# Altium PCB plotter.PcbDoc
Units mm, origin at the board's own origin, x right, y up, seen from the top; angles counter-clockwise.
Board outline 112.85 x 137.5 mm, 2 copper layers (Top Layer, Bottom Layer); 113 components, 83 nets, 522 pads, 138 vias.
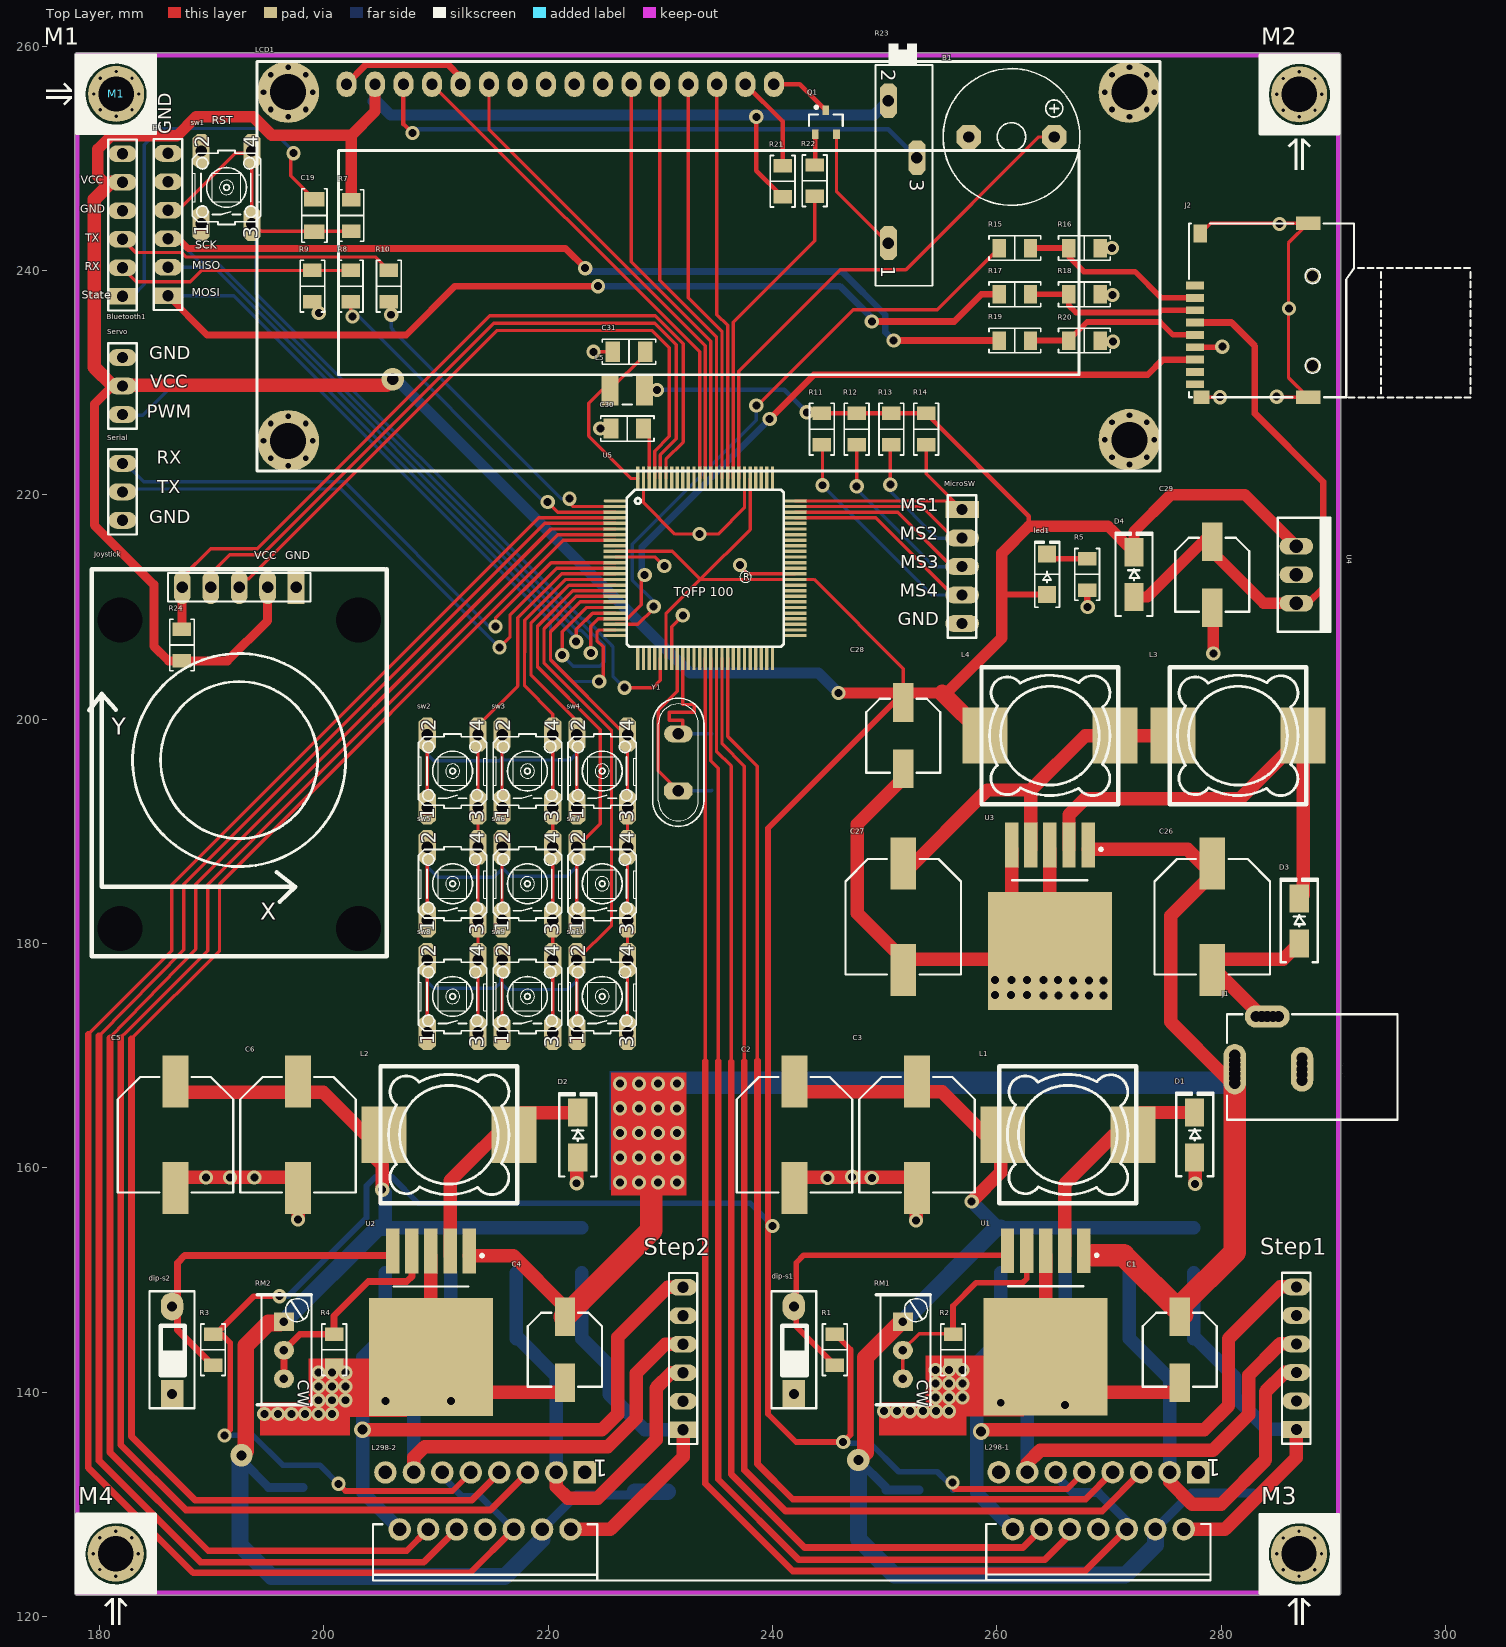
[diagram p0: Top Layer view]
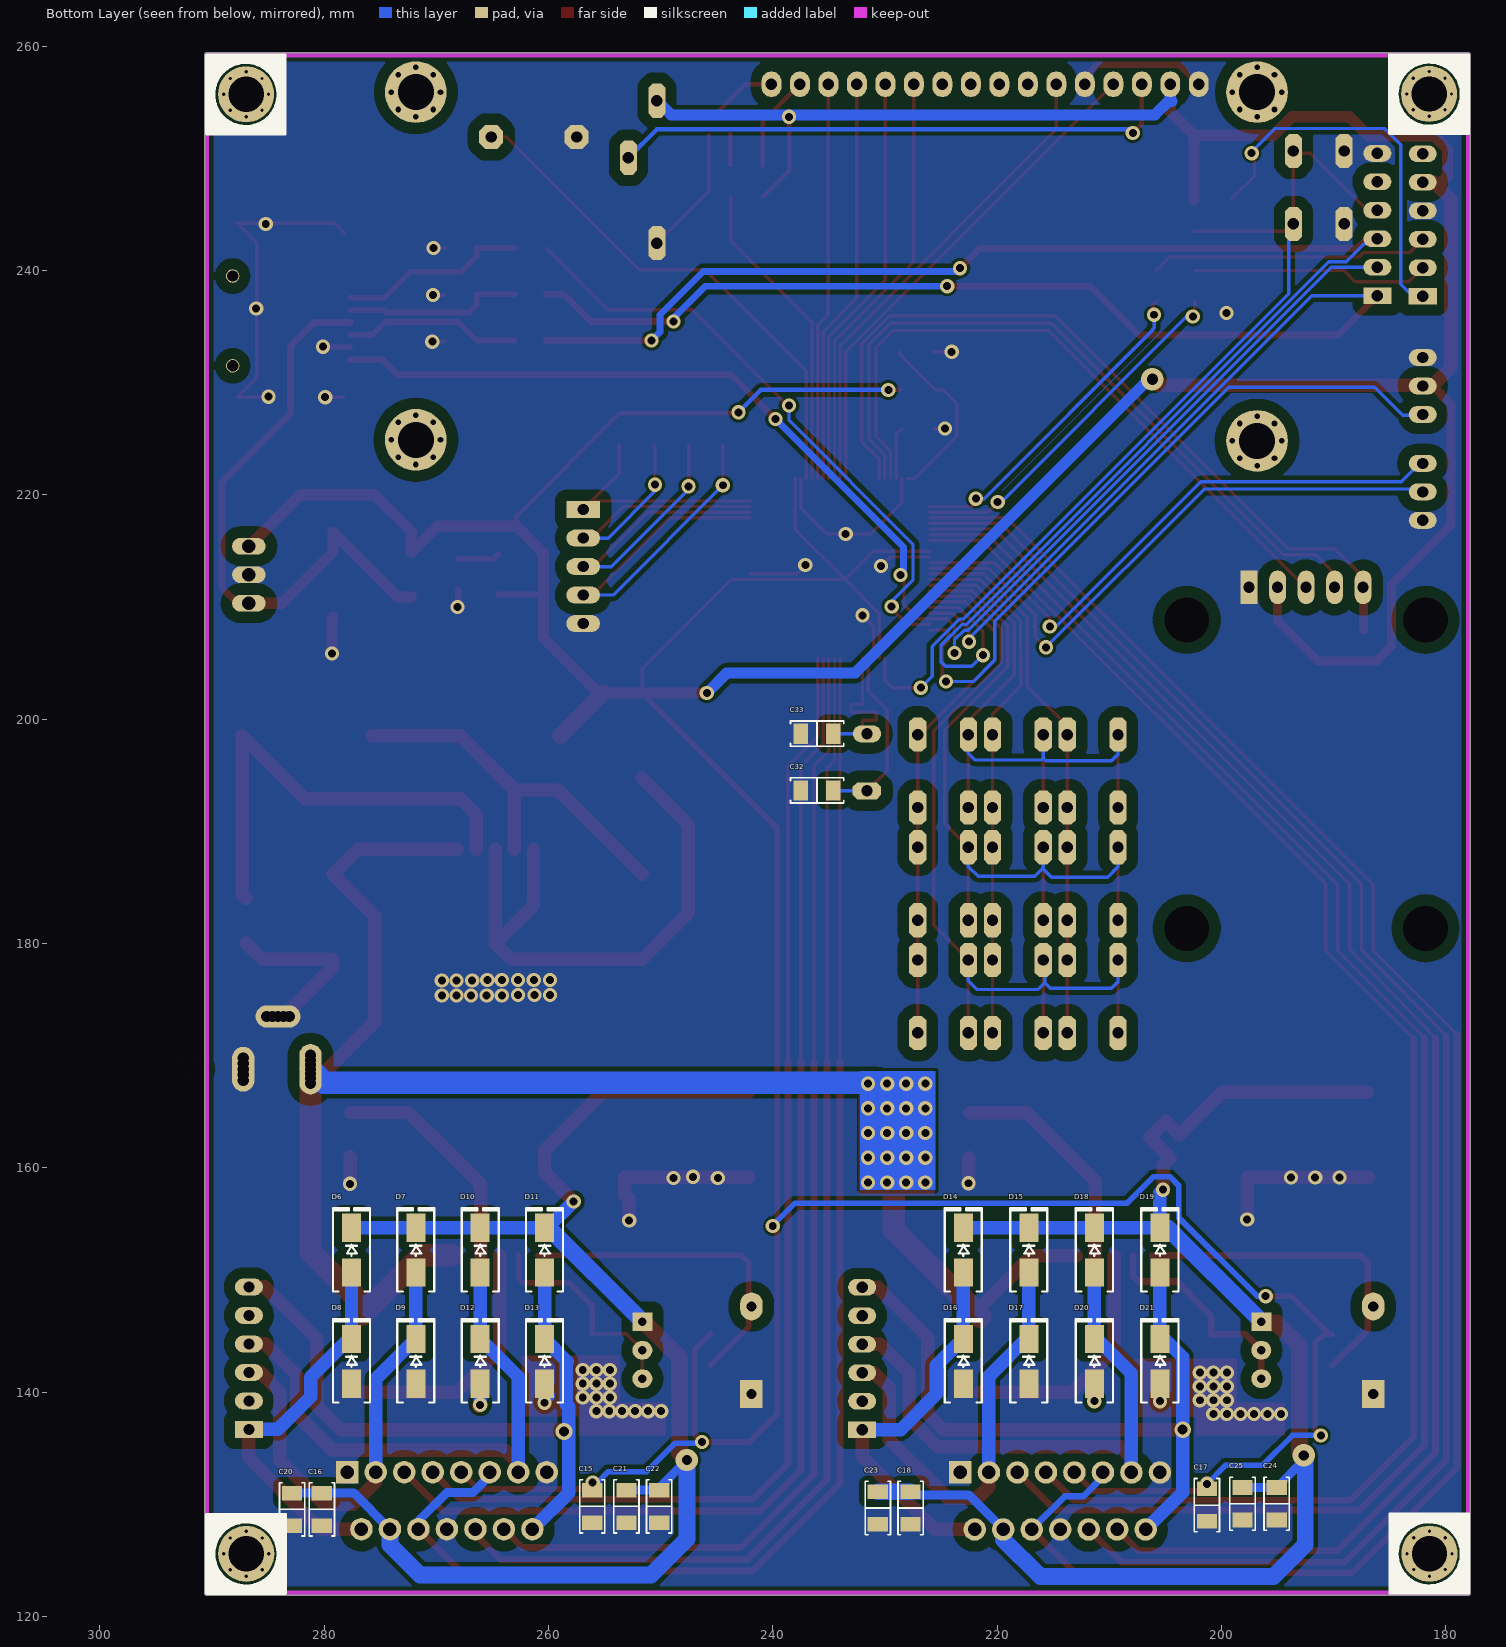
[diagram p1: Bottom Layer view, seen from below]

## Layer stack, top to bottom
Top Solder: solder mask 0.0102, Solder Resist, Dk 3.5
Top Layer: signal copper 0.0356
Dielectric 1: dielectric 0.32, FR-4, Dk 4.8
Bottom Layer: signal copper 0.0356
Bottom Solder: solder mask 0.0102, Solder Resist, Dk 3.5

## Board outline
177.8,122.1 ccw(c178,122.1) 178,121.9 290.45,121.9 ccw(c290.45,122.1) 290.65,122.1 290.65,259.2 ccw(c290.45,259.2) 290.45,259.4 178,259.4 ccw(c178,259.2) 177.8,259.2

## Design rules (kind name [scope] priority, off if disabled: settings)
Clearance [All] p1: gap=0.254 ignorepadtopadclearanceinfootprint=TRUE except(0: Arc-Hole Track-Hole SMDPad-Hole THPad-Hole Via-Hole Fill-Hole Poly-Hole Region-Hole Text-Hole; 0.08: Arc-SMDPad Track-SMDPad SMDPad-SMDPad; 0.195: Arc-Arc Arc-Track Track-Track; 0.4: Arc-Fill Arc-Poly Arc-Region Track-Fill Track-Poly Track-Region; 0.8: SMDPad-Fill SMDPad-Poly SMDPad-Region; 1: THPad-Fill THPad-Poly THPad-Region)
Height [All] p1 off: minheight=0 maxheight=25.4 prefheight=12.7
Length "InNet('NetC33_1') Or InNet('NetC32_1')_1" [InNet('NetC33_1') Or InNet('NetC32_1')] p1: maxlimit=16.306 minlimit=16
Length "InNet('NetC33_1') Or InNet('NetC32_1')" [InNet('NetC33_1') Or InNet('NetC32_1')] p2: maxlimit=16.306 minlimit=0
PolygonConnect [All] p1: connectstyle=Direct reliefconductorwidth=0.254 reliefentries=4 polygonreliefangle="90 Angle" airgapwidth=0.254
RoomDefinition step-drive [InComponentClass('step-drive')] p1 off: confinementstyle=ConfineIn formatcopy=TRUE lockcomponents=FALSE outline 334.719,324.612 522.933,324.612 522.933,348.742 334.719,348.742
RoomDefinition power2 [InComponentClass('power2')] p2 off: confinementstyle=ConfineIn formatcopy=TRUE lockcomponents=FALSE outline 333.121,297.688 437.007,297.688 437.007,322.453 333.121,322.453
RoomDefinition power1 [InComponentClass('power1')] p3 off: confinementstyle=ConfineIn formatcopy=TRUE lockcomponents=FALSE outline 331.346,278.384 480.825,278.384 480.825,297.18 331.346,297.18
RoomDefinition main [InComponentClass('main')] p4 off: confinementstyle=ConfineIn formatcopy=TRUE lockcomponents=FALSE outline 333.121,255.143 389.509,255.143 389.509,276.479 333.121,276.479
RoomDefinition accessory [InComponentClass('accessory')] p5 off: confinementstyle=ConfineIn formatcopy=TRUE lockcomponents=FALSE outline 333.121,150.749 482.727,150.749 482.727,169.037 333.121,169.037
RoomDefinition accessory2 [InComponentClass('accessory2')] p6 off: confinementstyle=ConfineIn formatcopy=TRUE lockcomponents=FALSE outline 333.527,170.861 580.161,170.861 580.161,254.554 333.527,254.554
RoutingVias [All] p1: holewidth=0.711 width=1.27 viastyle="Through Hole" minholewidth=0.711 minwidth=1.27 maxholewidth=0.711 maxwidth=1.27
SolderMaskExpansion [All] p1: expansion=0.102 istentingtop=FALSE
Width [All] p1: maxlimit=2.5 minlimit=0.254 preferedwidth=0.3
29 further rules are at their usual default settings.

## Classes and differential pairs
component class step-drive: C15 C16 C17 C18 C20 C21 C22 C23 C24 C25 D6 D7 D8 D9 D10 D11 D12 D13 D14 D15 D16 D17 D18 D19 D20 D21 L298-1 L298-2 Step1 Step2
component class power2: C26 C27 C28 C29 D3 D4 L3 L4 led1 R5 U3 U4
component class power1: C1 C2 C3 C4 C5 C6 D1 D2 dip-s1 dip-s2 J1 L1 L2 R1 R2 R3 R4 RM1 RM2 U1 U2
component class main: C30 C31 C32 C33 L5 M1 M2 M3 M4 U5 Y1
component class accessory: Bluetooth1 C19 H1 J2 Joystick MicroSW R7 R8 R9 R10 R11 R12 R13 R14 R15 R16 R17 R18 R19 R20 R24 Servo sw1
component class accessory2: B1 LCD1 Q1 R21 R22 R23 Serial sw2 sw3 sw4 sw5 sw6 sw7 sw8 sw9 sw10

## Components (designator, comment, footprint, x,y, rotation, side; value= is the part's Value field where it differs from the comment)
B1 "Buzzer small" My_Buzzer 261.3,251.9 r0 top
Bluetooth1 "H-1x6" H-1x6 182.05,244.177 r90 top
C1 "" "CAP ALUM 6.6MM" 276.3,143.777 r270 top value=100uF
C2 "" "CAP ALUM 10.3MM" 241.95,162.95 r270 top value=1000uF
C3 "" "CAP ALUM 10.3MM" 252.88,162.95 r270 top value=1000uF
C4 "" "CAP ALUM 6.6MM" 221.488,143.777 r270 top value=100uF
C5 "" "CAP ALUM 10.3MM" 186.77,162.95 r270 top value=1000uF
C6 "" "CAP ALUM 10.3MM" 197.7,162.95 r270 top value=1000uF
C15 "100nF" "CAP 1206/3216 - 0.8MM" 256.094,129.817 r90 bottom
C16 "100nF" "CAP 1206/3216 - 0.8MM" 280.2,129.55 r90 bottom
C17 "100nF" "CAP 1206/3216 - 0.8MM" 201.295,129.921 r90 bottom
C18 "100nF" "CAP 1206/3216 - 0.8MM" 227.711,129.667 r90 bottom
C19 "Cap" "CAP 1206/3216 - 0.8MM" 199.15,244.899 r270 top value=100nF
C20 "Cap" "CAP 1206/3216 - 0.8MM" 282.85,129.55 r270 bottom value=100nF
C21 "Cap" "CAP 1206/3216 - 0.8MM" 253.046,129.817 r270 bottom value=100nF
C22 "Cap" "CAP 1206/3216 - 0.8MM" 250.125,129.817 r270 bottom value=100nF
C23 "Cap" "CAP 1206/3216 - 0.8MM" 230.632,129.667 r270 bottom value=100nF
C24 "Cap" "CAP 1206/3216 - 0.8MM" 195.072,130.048 r270 bottom value=100nF
C25 "Cap" "CAP 1206/3216 - 0.8MM" 198.12,130.048 r270 bottom value=100nF
C26 "" "CAP ALUM 10.3MM" 279.208,182.382 r270 top value=680uF
C27 "" "CAP ALUM 10.3MM" 251.649,182.382 r270 top value=1000uF
C28 "" "CAP ALUM 6.6MM" 251.649,198.524 r270 top value=100uF
C29 "Cap" "CAP ALUM 6.6MM" 279.208,212.875 r270 top value=100u
C30 "Cap" "CAP 1206/3216 - 0.8MM" 227.05,225.9 r0 top value=100nF
C31 "Cap" "CAP 1206/3216 - 0.8MM" 227.2,232.75 r0 top value=100nF
C32 "Cap" "CAP 1206/3216 - 0.8MM" 236.05,193.65 r0 bottom value=22pF
C33 "Cap" "CAP 1206/3216 - 0.8MM" 236.05,198.7 r0 bottom value=22pF
D1 "1n5822" "DO214AC SMA" 277.633,162.93 r90 top
D2 "1n5822" "DO214AC SMA" 222.638,162.916 r90 top
D3 "1n5822" "DO214AC SMA" 286.955,182.014 r90 top
D4 "Diode 1N4007" "DO214AC SMA" 272.223,212.875 r90 top
D6 "UF4007" "DO214AC SMA" 277.554,152.654 r90 bottom
D7 "UF4007" "DO214AC SMA" 271.818,152.654 r90 bottom
D8 "UF4007" "DO214AC SMA" 277.554,142.748 r90 bottom
D9 "UF4007" "DO214AC SMA" 271.818,142.748 r90 bottom
D10 "UF4007" "DO214AC SMA" 266.082,152.654 r90 bottom
D11 "UF4007" "DO214AC SMA" 260.346,152.654 r90 bottom
D12 "UF4007" "DO214AC SMA" 266.082,142.748 r90 bottom
D13 "UF4007" "DO214AC SMA" 260.346,142.748 r90 bottom
D14 "UF4007" "DO214AC SMA" 223.012,152.654 r90 bottom
D15 "UF4007" "DO214AC SMA" 217.17,152.654 r90 bottom
D16 "UF4007" "DO214AC SMA" 223.012,142.748 r90 bottom
D17 "UF4007" "DO214AC SMA" 217.17,142.748 r90 bottom
D18 "UF4007" "DO214AC SMA" 211.328,152.654 r90 bottom
D19 "UF4007" "DO214AC SMA" 205.486,152.654 r90 bottom
D20 "UF4007" "DO214AC SMA" 211.328,142.748 r90 bottom
D21 "UF4007" "DO214AC SMA" 205.486,142.748 r90 bottom
dip-s1 "dip-sw1" DIP2 241.9,139.84 r90 top
dip-s2 "dip-sw1" DIP2 186.466,139.84 r90 top
H1 "H-1x6" H-1x6 186.1,244.217 r90 top
J1 "Power Jack" "Power Jack" 295.709,168.79 r180 top
J2 "MicroSD" MicroSD_1 282.9,236.45 r90 top
Joystick "H-1x5" H-1x5 192.45,211.75 r180 top
L1 "Inductor" "INDUCTOR - 12X12X7" 266.33,162.95 r270 top value=100uH
L2 "Inductor" "INDUCTOR - 12X12X7" 211.15,162.95 r270 top value=100uH
L3 "Inductor" "INDUCTOR - 12X12X7" 281.494,198.524 r270 top value=100uH
L4 "Inductor" "INDUCTOR - 12X12X7" 264.73,198.524 r270 top value=20uH
L5 "Inductor" C1210_M 227.05,229.35 r0 top value=10uH
L298-1 "L298" L298 268.794,130.198 r180 top
L298-2 "L298" L298 214.122,130.175 r180 top
LCD1 "20x4" "LCD 16x2" 202.02,256.6 r0 top locked
led1 "LED" "LED 1206/3216 RED" 264.476,212.908 r90 top
M1 "Screw" "Board Screw" 181.486,255.736 r270 top
M2 "Screw" "Board Screw" 286.95,255.7 r0 top
M3 "Screw" "Board Screw" 286.936,125.586 r0 top
M4 "Screw" "Board Screw" 181.45,125.6 r0 top
MicroSW "H-1x5" H-1x5 256.9,213.6 r270 top
Q1 "C945" SOT23_L 244.75,253.2 r90 top
R1 "Res1" "RES 1206/3216" 245.553,143.777 r90 top value=10K
R2 "Res1" "RES 1206/3216" 256.094,143.777 r90 top value=1.21K
R3 "Res1" "RES 1206/3216" 190.119,143.777 r90 top value=10K
R4 "Res1" "RES 1206/3216" 200.914,143.777 r90 top value=1.21K
R5 "Res1" "RES 1206/3216" 268.05,212.908 r270 top value=1K
R7 "Res1" "RES 1206/3216" 202.45,244.899 r90 top value=10K
R8 "Res1" "RES 1206/3216" 202.393,238.6 r90 top value=2.7k
R9 "Res1" "RES 1206/3216" 198.986,238.6 r90 top value=4.7k
R10 "Res1" "RES 1206/3216" 205.8,238.6 r270 top value=1K
R11 "Res1" "RES 1206/3216" 244.4,225.85 r90 top value=1K
R12 "Res1" "RES 1206/3216" 247.5,225.85 r90 top value=1K
R13 "Res1" "RES 1206/3216" 250.6,225.85 r90 top value=1K
R14 "Res1" "RES 1206/3216" 253.7,225.85 r90 top value=1K
R15 "Res1" "RES 1206/3216" 261.6,242 r180 top value=2.2K
R16 "Res1" "RES 1206/3216" 267.8,242 r0 top value=3.3K
R17 "Res1" "RES 1206/3216" 261.6,237.875 r0 top value=2.2K
R18 "Res1" "RES 1206/3216" 267.8,237.875 r180 top value=3.3K
R19 "Res1" "RES 1206/3216" 261.6,233.75 r0 top value=2.2K
R20 "Res1" "RES 1206/3216" 267.8,233.75 r180 top value=3.3K
R21 "Res1" "RES 1206/3216" 240.9,247.95 r90 top value=330
R22 "Res1" "RES 1206/3216" 243.75,248 r90 top value=1K
R23 "Multi_turn" My_Pot_trim 251.6,248.15 r270 top value=10K
R24 "Res1" "RES 1206/3216" 187.35,206.6 r90 top value=1K
RM1 "Multi_turn" "Multi Turn 02" 251.624,146.277 r0 top value=50K
RM2 "Multi_turn" "Multi Turn 02" 196.444,146.277 r0 top value=50K
Serial "H-1x3" H-1x3 182.05,220.26 r270 top
Servo "H-1x3" H-1x3 182.05,229.7 r90 top
Step1 "H-1x6" H-1x6 286.701,143.152 r90 top
Step2 "H-1x6" H-1x6 232.029,143.129 r90 top
sw1 "Tac switch" MY_TACTILE-PTH 191.3,247.45 r90 top
sw2 "Tac switch" MY_TACTILE-PTH 211.455,195.419 r90 top
sw3 "Tac switch" MY_TACTILE-PTH 218.123,195.419 r90 top
sw4 "Tac switch" MY_TACTILE-PTH 224.79,195.419 r90 top
sw5 "Tac switch" MY_TACTILE-PTH 211.455,185.373 r90 top
sw6 "Tac switch" MY_TACTILE-PTH 218.123,185.373 r90 top
sw7 "Tac switch" MY_TACTILE-PTH 224.79,185.373 r90 top
sw8 "Tac switch" MY_TACTILE-PTH 211.455,175.328 r90 top
sw9 "Tac switch" MY_TACTILE-PTH 218.123,175.328 r90 top
sw10 "Tac switch" MY_TACTILE-PTH 224.79,175.328 r90 top
U1 "lm2596-adj" DPAK170P1430X238-6N 264.349,146.2 r270 top
U2 "lm2596-adj" DPAK170P1430X238-6N 209.55,146.177 r270 top
U3 "lm2596-5v" DPAK170P1430X238-6N 264.73,182.382 r270 top
U4 "LF33" REG-7805-WALL 286.701,212.875 r270 top
U5 "ATMEGA2560" MY_ATMEGA2560 231.587,213.704 r0 top
Y1 "CRYSTAL" My_Crystal 231.6,196.15 r90 top locked

## Footprints (in the part's own frame and the unit in brackets; to place one, negate y for a bottom-side part, rotate by r counter-clockwise, add the part's x,y. Pads: shape width x height; smd on the part's side, far side on the other; paste and mask are expansions set on the pad)
"Board Screw" [mm]
  round 0.6 hole 0.3: S(-2,0) S(-1.414,1.414) S(-1.414,-1.414) S(0,2) S(0,-2) S(1.414,1.414) S(1.414,-1.414) S(2,0)
  round 5 hole 3.15 mask+0.1: S(0,0)
  silkscreen extent -3.49,-6.75 3.56,3.52
C1210_M [mm] "Chip Capacitor, Body 3.2x2.5mm, IPC Low Density"
  rect 1.5x2.8 smd: 1(-1.55,0) 2(1.55,0)
  silkscreen extent -0.4,-1.3 0.4,1.3, body extent -1.7,-1.35 1.7,1.35, height 1.5
"CAP 1206/3216 - 0.8MM" [mm] "Chip Capacitor, 2-Leads, Body 3.25x1.60mm, IPC Medium Density"
  rect 1.3x1.8 smd: 1(-1.45,0) 2(1.45,0)
  silkscreen extent -2.37,-1.12 2.37,1.12, body extent -1.6,-0.8 1.6,0.8, height 0.8
"CAP ALUM 6.6MM" [mm] "Aluminum Electrolytic Capacitor, Body 6.60x6.60x7.70mm, IPC Low Density"
  rect 3.45x1.8 smd: 1(-2.95,0) 2(2.95,0)
  silkscreen extent -3.3,-3.3 3.3,3.3, body extent -3.5,-3.3 3.5,3.3, height 7.7
"CAP ALUM 10.3MM" [mm] "Aluminum Electrolytic Capacitor, Body 10.30x10.30x10.50mm, IPC Low Density"
  rect 4.65x2.3 smd: 1(-4.75,0) 2(4.75,0)
  silkscreen extent -5.15,-5.15 5.15,5.15, body extent -5.8,-5.15 5.8,5.15, height 10.5
DIP2 [mm]
  rect 2.5x2 hole 0.9: 1(0,0)
  oval 2.5x2 hole 0.9: 2(7.8,0)
  silkscreen extent -1.27,-2 9.14,2
"DO214AC SMA" [mm] "Molded Diode, 2-Leads, Body 4.30x2.60mm, IPC Medium Density"
  rect 2.5x1.7 smd: 1(-2,0) 2(2,0)
  silkscreen extent -3.68,-1.65 3.75,1.65, body extent -2.6,-1.37 2.6,1.37, height 2.4
DPAK170P1430X238-6N [mm] "D2-PAK, 6-Pads, Body 6.20x6.72mm (max), IPC Medium Density"
  rect 4x1.2 smd: 1(-6.4,3.4) 2(-6.4,1.7) 3(-6.4,0) 4(-6.4,-1.7) 5(-6.4,-3.4)
  rect 10.5x11.05 smd: 3(3.048,0)
  silkscreen extent -6.12,-3.35 -3.25,4.68, body extent -2.05,-3.35 4.15,3.35, height 2.38
H-1x3 [mm]
  oval 1.5x2.5 hole 1: 1(-2.54,0) 2(0,0) 3(2.54,0)
  silkscreen extent -3.81,-1.27 3.81,1.27
H-1x5 [mm]
  rect 1.5x3 hole 1: 1(-5.08,0)
  oval 1.5x3 hole 1: 2(-2.54,0) 3(0,0) 4(2.54,0) 5(5.08,0)
  silkscreen extent -6.35,-1.27 6.35,1.27
H-1x6 [mm]
  rect 1.5x2.5 hole 1: 1(-6.477,0)
  oval 1.5x2.5 hole 1: 2.5(-3.937,0) 3(-1.397,0) 4(1.143,0) 5(3.683,0) 6(6.223,0)
  silkscreen extent -7.75,-1.27 7.49,1.27
"INDUCTOR - 12X12X7" [mm]
  rect 5x4 smd: 1(0,5.8) 2(0,-5.8)
  silkscreen extent -6.1,-6.1 6.1,6.1
L298 [mm]
  rect 2x2 hole 1.2: 1(-9.144,-2.667)
  round 2 hole 1.2: 2(-7.874,2.413) 3(-6.604,-2.667) 4(-5.334,2.413) 5(-4.064,-2.667) 6(-2.794,2.413) 7(-1.524,-2.667) 8(-0.254,2.413) 9(1.016,-2.667) 10(2.286,2.413) 11(3.556,-2.667) 12(4.826,2.413) 13(6.096,-2.667) 14(7.366,2.413) 15(8.636,-2.667)
  silkscreen extent -10.25,1.96 9.75,6.96
"LCD 16x2" [mm] "Character LCD, 2 Row, 16 Colunm"
  oval 1.778x2.286 hole 1.016: 1(0,0) 2(2.54,0) 3(5.08,0) 4(7.62,0) 5(10.16,0) 6(12.7,0) 7(15.24,0) 8(17.78,0) 9(20.32,0) 10(22.86,0) 11(25.4,0) 12(27.94,0) 13(30.48,0) 14(33.02,0) 15(35.56,0) 16(38.1,0)
  round 0.6 hole 0.5: MH(-7.4,-31.8) MH(-7.4,-0.7) MH(-6.756,-33.356) MH(-6.756,-30.244) MH(-6.756,-2.256) MH(-6.756,0.856) MH(-5.2,-34) MH(-5.2,-29.6) MH(-5.2,-2.9) MH(-5.2,1.5) MH(-3.644,-33.356) MH(-3.644,-30.244) MH(-3.644,-2.256) MH(-3.644,0.856) MH(-3,-31.8) MH(-3,-0.7) MH(67.6,-31.7) MH(67.6,-0.7) MH(68.244,-33.256) MH(68.244,-30.144) MH(68.244,-2.256) MH(68.244,0.856) MH(69.8,-33.9) MH(69.8,-29.5) MH(69.8,-2.9) MH(69.8,1.5) MH(71.356,-33.256) MH(71.356,-30.144) MH(71.356,-2.256) MH(71.356,0.856) MH(72,-31.7) MH(72,-0.7)
  round 5.5 hole 3.2: MH(-5.2,-31.8) MH(-5.2,-0.7) MH(69.8,-31.7) MH(69.8,-0.7)
  silkscreen extent -7.99,-34.47 72.51,2.03, body extent -7.99,-34.47 72.51,2.03, height 25.52
"LED 1206/3216 RED" [mm] "Chip Diode, 2-Leads, Body 3.13x1.55mm, IPC Medium Density"
  rect 1.5x1.6 smd: 1(-1.8,0) 2(1.8,0)
  silkscreen extent -2.92,-1.1 2.92,1.1, body extent -1.6,-0.8 1.6,0.8, height 0.9
MicroSD_1 [mm] "altium designer (M.Hariri)"
  round 1.2 hole 1: 0(-4.95,-5.25) 0(3.05,-5.25)
  rect 0.7x1.6 smd: 1(2.2,5.25) 2(1.1,5.25) 3(0,5.25) 4(-1.1,5.25) 5(-2.2,5.25) 6(-3.3,5.25) 7(-4.4,5.25) 8(-5.5,5.25) 9(-6.6,5.25)
  rect 1.2x1.4 smd: sh1(-7.75,4.65)
  rect 1.2x2.2 smd: sh2(-7.75,-4.85) sh3(7.75,-4.85)
  rect 1.6x1.2 smd: sh4(6.85,4.75)
  silkscreen extent -7.77,-19.32 7.74,5.77
"Multi Turn 02" [mil]
  rect 70x65 hole 30: 1(0,0)
  oval 70x65 hole 30: 2(0,-200) 3(0,-100)
  silkscreen extent -94,-291 96,94, body extent -73,-285 93,89, height 452
MY_ATMEGA2560 [mm]
  oval 2.1x0.3 smd: 1(-5.587,5.746)
  rect 2.1x0.3 smd: 2(-5.587,5.246) 3(-5.587,4.746) 4(-5.587,4.246) 5(-5.587,3.746) 6(-5.587,3.246) 7(-5.587,2.746) 8(-5.587,2.246) 9(-5.587,1.746) 10(-5.587,1.246) 11(-5.587,0.746) 12(-5.587,0.246) 13(-5.587,-0.254) 14(-5.587,-0.754) 15(-5.587,-1.254) 16(-5.587,-1.754) 17(-5.587,-2.254) 18(-5.587,-2.754) 19(-5.587,-3.254) 20(-5.587,-3.754) 21(-5.587,-4.254) 22(-5.587,-4.754) 23(-5.587,-5.254) 24(-5.587,-5.754) 25(-5.587,-6.254) 51(10.413,-6.254) 52(10.413,-5.754) 53(10.413,-5.254) 54(10.413,-4.754) 55(10.413,-4.254) 56(10.413,-3.754) 57(10.413,-3.254) 58(10.413,-2.754) 59(10.413,-2.254) 60(10.413,-1.754) 61(10.413,-1.254) 62(10.413,-0.754) 63(10.413,-0.254) 64(10.413,0.246) 65(10.413,0.746) 66(10.413,1.246) 67(10.413,1.746) 68(10.413,2.246) 69(10.413,2.746) 70(10.413,3.246) 71(10.413,3.746) 72(10.413,4.246) 73(10.413,4.746) 74(10.413,5.246) 75(10.413,5.746)
  rect 0.3x2.1 smd: 26(-3.587,-8.254) 27(-3.087,-8.254) 28(-2.587,-8.254) 29(-2.087,-8.254) 30(-1.587,-8.254) 31(-1.087,-8.254) 32(-0.587,-8.254) 33(-0.087,-8.254) 34(0.413,-8.254) 35(0.913,-8.254) 36(1.413,-8.254) 37(1.913,-8.254) 38(2.413,-8.254) 39(2.913,-8.254) 40(3.413,-8.254) 41(3.913,-8.254) 42(4.413,-8.254) 43(4.913,-8.254) 44(5.413,-8.254) 45(5.913,-8.254) 46(6.413,-8.254) 47(6.913,-8.254) 48(7.413,-8.254) 49(7.913,-8.254) 50(8.413,-8.254) 76(8.413,7.746) 77(7.913,7.746) 78(7.413,7.746) 79(6.913,7.746) 80(6.413,7.746) 81(5.913,7.746) 82(5.413,7.746) 83(4.913,7.746) 84(4.413,7.746) 85(3.913,7.746) 86(3.413,7.746) 87(2.913,7.746) 88(2.413,7.746) 89(1.913,7.746) 90(1.413,7.746) 91(0.913,7.746) 92(0.413,7.746) 93(-0.087,7.746) 94(-0.587,7.746) 95(-1.087,7.746) 96(-1.587,7.746) 97(-2.087,7.746) 98(-2.587,7.746) 99(-3.087,7.746) 100(-3.587,7.746)
  silkscreen extent -4.59,-7.25 9.41,6.75
My_Buzzer [mil]
  oct 85x85 hole 40: +(150,0) -(-150,0)
  silkscreen extent -240,-240 240,240
My_Crystal [mil]
  oct 60x100 hole 40: 1(-100,0)
  oval 60x100 hole 40: 2(100,0)
  silkscreen extent -225,-90 225,90
My_Pot_trim [mil]
  oct 120x60 hole 40: 1(225,-50) 2(-275,-50) 3(-75,50)
  silkscreen extent -475,-95 375,105
MY_TACTILE-PTH [mil]
  oct 120x60 hole 40: 1(-130,88) 1(126,88) 2(-130,-90) 2(126,-90)
  silkscreen extent -132,-121 128,119
"Power Jack" [mm] "Power Adaptor Jack"
  round 1.5 hole 1: 1(14.5,-1.25) 1(14.5,-0.8) 1(14.5,-0.4) 1(14.5,0.4) 1(14.5,0.8) 1(14.5,1.25) 2(8.5,-1) 2(8.5,1) 2(8.5,-0.5) 2(8.5,0.5) 3(10.6,-4.7) 3(11.1,-4.7) 3(12.1,-4.7) 3(12.6,-4.7)
  oval 2x4.5 hole 1: 1(14.5,0)
  oval 2x4 hole 1: 2(8.5,0)
  oval 4x2 hole 1: 3(11.6,-4.7)
  round 1.9 hole 2: MH(4,0)
  silkscreen extent 0,-4.9 15.2,4.5, body extent 0,-4.9 15.2,4.5, height 11
REG-7805-WALL [mm]
  oval 1.5x3 hole 1.2: 1(-2.54,0) 2(0,0) 3(2.54,0)
  silkscreen extent -5.08,-1.65 5.08,3.05, body extent -5.2,-1.71 5.2,2.79, height 20
"RES 1206/3216" [mm] "Chip Resistor, 2-Leads, Body 3.13x1.55mm, IPC Medium Density"
  rect 1.2x1.65 smd: 1(-1.4,0) 2(1.4,0)
  silkscreen extent -2.3,-1.1 2.3,1.1, body extent -1.57,-0.8 1.62,0.8, height 0.6
SOT23_L [mm] "SOT23, 3-Leads, Body 2.9x1.3mm, Pitch 0.95mm, Lead Span 2.3mm - Reverse Pinning, IPC High Density"
  rect 0.85x0.6 smd: 1(1.075,0) 2(-1.075,-0.95) 3(-1.075,0.95)
  silkscreen extent -0.3,-1.5 1.47,1.5, body extent -0.7,-1.5 0.7,1.5, height 1.1

## Part data
B1: library part Buzzer, "5-12v small buzzer (12mm)"
C1 C2 C3 C4 C5 C6 C26 C27 C28: library part "Cap Pol1", "Polarized Capacitor (Radial)", LatestRevisionDate=17-Jul-2002, LatestRevisionNote="Re-released for DXP Platform.", PackageDescription="Polarized Capacitor (Radial); 2 Leads", PackageReference=RB7.6-15, Published=8-Jun-2000, Publisher="Altium Limited"
C15 C16 C17 C18 C19 C20 C21 C22 C23 C24 C25 C30 C31 C32 C33: library part "Cap ceramic", "CAP-100Nf"
C29: library part "Cap Pol", "CAP-3300Uf"
D1 D2 D3 D6 D7 D8 D9 D10 D11 D12 D13 D14 D15 D16 D17 D18 D19 D20 D21: library part "Diode 1N4007", "1 Amp General Purpose Rectifier", Code_JEDEC=DO-204-AL, ComponentLink1Description="Manufacturer Link", ComponentLink1URL=http://www.fairchildsemi.com/, ComponentLink2Description=Datasheet, ComponentLink2URL=http://www.fairchildsemi.com/ds/1N%2F1N4001.pdf, DatasheetVersion=1998, LatestRevisionDate=17-Jul-2002, LatestRevisionNote="Re-released for DXP Platform.", PackageDescription="Diode, Axial; Body 5.2 x 2.7 mm (LxDia. max), Lead Dia. 0.86 mm (max)", PackageReference=DO-41, PackageVersion=Aug-1999, Published=8-Jun-2000, Publisher="Altium Limited"
D4: "1 Amp General Purpose Rectifier", Code_JEDEC=DO-204-AL, ComponentLink1Description="Manufacturer Link", ComponentLink1URL=http://www.fairchildsemi.com/, ComponentLink2Description=Datasheet, ComponentLink2URL=http://www.fairchildsemi.com/ds/1N%2F1N4001.pdf, DatasheetVersion=1998, LatestRevisionDate=17-Jul-2002, LatestRevisionNote="Re-released for DXP Platform.", PackageDescription="Diode, Axial; Body 5.2 x 2.7 mm (LxDia. max), Lead Dia. 0.86 mm (max)", PackageReference=DO-41, PackageVersion=Aug-1999, Published=8-Jun-2000, Publisher="Altium Limited"
J2: "MicroSD_altium designer (M.Hariri)", Created by="altium designer (M.Hariri)"
LCD1: library part LCD, Adding Date=10/21/2009, Company="My self", Designer="Saeid Jorablo", LCDType=20x4
led1: "Typical INFRARED GaAs LED", LatestRevisionDate=08-Jul-2005, LatestRevisionNote="Mech Layer 1 removed.", Published=8-Jun-2000, Publisher="Altium Limited"
M1 M2 M3 M4: library part "Board Screw", "Board Screw With Spacer"
Q1: "NPN Transistor", Company="IPA CO", Designer="Saeid Jorablo", Last Update Time=2008/08/04
R1 R2 R3 R4 R5 R7 R8 R9 R10 R11 R12 R13 R14 R15 R16 R17 R18 R19 R20 R21 R22 R24: "Resistor", LatestRevisionDate=17-Jul-2002, LatestRevisionNote="Re-released for DXP Platform.", PackageDescription="Axial Device, Thru-Hole; 2 Leads; 0.3 in Pin Spacing", PackageReference=AXIAL-0.3, Published=8-Jun-2000, Publisher="Altium Limited"
R23 RM1 RM2: "Potentiometer", LatestRevisionDate=17-Jul-2002, LatestRevisionNote="Re-released for DXP Platform.", PackageReference=VR5, Published=8-Jun-2000, Publisher="Altium Limited", Set Position=0.5, Sim Note="Enter the Resistance value and the set point into parameter fields."
sw1 sw2 sw3 sw4 sw5 sw6 sw7 sw8 sw9 sw10: "small tac switch"
U1 U2 U3: library part lm2596
U4: library part 7805, "Regulator"
U5: "AVR 256K Bytes of In-System Programmable Flash Memory"
Y1: "Crystal"
J1: Adding Date=10/21/2009, Company=Personal, Designer="Saeid Jorablo", Project Name=Laser
L1 L2 L3 L4 L5: Code_IEC=1005, Code_JEITA=0402, LatestRevisionDate=29-May-2009, LatestRevisionNote="IPC-7351 Footprint Added.", PackageDescription="Chip Inductor", PackageReference=0402-A, Published=8-Jun-2000, Publisher="Altium Limited"

## Free pads (board coordinates)
  round 0 hole 4: sc(181.81,181.35) sc(181.81,208.85) sc(203.09,181.35) sc(203.09,208.85)

## Via types
v1: diameter 1.27, hole 0.711, Top Layer to Bottom Layer, 133 vias
v2: diameter 1.5, hole 0.9, Top Layer to Bottom Layer, 2 vias
v3: diameter 2, hole 0.9, Top Layer to Bottom Layer, 2 vias
v4: diameter 2, hole 1, Top Layer to Bottom Layer, 1 vias

## Nets (pads, with @x,y where several pads share a name; then routed paths per layer and width w, separated by ;. In a path a pad name is that pad's centre, name@x,y a point inside that pad or via, vN(x,y) a via of type N, cw(c..) or ccw(c..) an arc to the next point about the centre after c; other vN are vias at no path point)
3.3v: C29.1 D4.1 J2.4 U4.3 | length 53.8
  Top Layer w0.6: J2.4 280.9,235.35 283,233.25 283,227.25 289.1,221.15 289.1,211.7 287.735,210.335 U4.3
  Top Layer w1: D4.1 273.408,210.875 279.208,216.675 C29.1 279.208,214.892 283.765,210.335 U4.3
12V: C1.1 C4.1 C26.1 J1.1 U1.1 U2.1 U3.1 | length 146.9
  Top Layer w1.2: U2.1@212.95,152.177 216.888,152.177 C4.1@221.488,147.577 ; U3.1@268.13,188.382 277.008,188.382 279.208,186.182 275.5,182.474 275.5,173 280.46,168.041 280.96,167.54 281.209,167.54 281.209,167.99 281.209,168.39 J1.1@281.209,168.79
  Top Layer w2: C4.1 229.2,154.439 v1@229.2,160.9 ; 268.6,152.2 271.3,152.2 C1.1@276.55,146.95 ; C1.1@276.3,147.577 281.209,152.486 J1.1@281.209,167.54
  Bottom Layer w2: 230.65,167.6 280.019,167.6 J1.1@281.209,168.79
  other v1: 226.4,158.7 228.1,158.7 229.8,158.7 231.5,158.7 226.4,160.9 228.1,160.9 229.8,160.9 231.5,160.9 226.4,163.1 228.1,163.1 229.8,163.1 231.5,163.1 226.4,165.3 228.1,165.3 229.8,165.3 231.5,165.3 226.4,167.5 228.1,167.5 229.8,167.5 231.5,167.5
BUZ: B1.+ U5.82 | length 46.3
  Top Layer w0.3: U5.82 237,231 246.05,240.05 251.9,240.05 263.75,251.9 B1.+
cs: R15.2 U5.23 | length 54.9
  Top Layer w0.3: U5.23 228,208.45 229.4,209.85 v1(229.4,210.05) ; v1(238.55,227.95) 238.65,227.95 247.2,236.5 254.7,236.5 R15.2
  Bottom Layer w0.3: v1(229.4,210.05) 229.4,210.5 227.5,212.4 227.5,215.6 238.55,226.65 v1(238.55,227.95)
cs3.3: J2.2 R15.1 R16.1 | length 16.9
  Top Layer w0.5: R15.1 R16.1 266.4,241.25 267.75,239.9 272.3,239.9 274.65,237.55 J2.2
D1: LCD1.11 U5.87 | length 38.1
  Top Layer w0.3: LCD1.11 227.42,240.78 234.5,233.7 U5.87
D2: LCD1.12 U5.86 | length 37.2
  Top Layer w0.3: LCD1.12 229.96,239.14 235,234.1 U5.86
D3: LCD1.13 U5.85 | length 36.4
  Top Layer w0.3: LCD1.13 232.5,237.55 235.5,234.55 U5.85
D4: LCD1.14 U5.84 | length 35.5
  Top Layer w0.3: LCD1.14 235.04,236.06 236,235.1 U5.84
E: LCD1.6 U5.88 | length 43.1
  Top Layer w0.3: LCD1.6 214.72,252.58 234,233.3 U5.88
En: Bluetooth1.6
endx1: MicroSW.1 R14.1 U5.75 | length 21.2
  Top Layer w0.3: U5.75 256.13,219.45 ; R14.1 253.7,221.88 256.13,219.45 ; MicroSW.1 256.13,219.45
endx2: MicroSW.2 R13.1 U5.74 | length 28.4
  Top Layer w0.3: U5.74 253.35,218.95 255.8,216.5 256.54,216.5 MicroSW.2 ; v1(250.5,220.9) 250.5,224.35 R13.1
  Bottom Layer w0.3: v1(250.5,220.9) 250.5,220.3 254.66,216.14 MicroSW.2
endy1: MicroSW.3 R12.1 U5.73 | length 33.1
  Top Layer w0.3: U5.73 251.15,218.45 256,213.6 MicroSW.3 ; v1(247.5,220.75) R12.1
  Bottom Layer w0.3: v1(247.5,220.75) 247.5,220.5 254.4,213.6 MicroSW.3
endy2: MicroSW.4 R11.1 U5.72 | length 38.4
  Top Layer w0.3: U5.72 249.2,217.95 256.09,211.06 MicroSW.4 ; v1@244.4,220.4 244.45,220.45 v1(244.45,220.85) 244.45,224.4 R11.1
  Bottom Layer w0.3: v1(244.45,220.85) 254.24,211.06 MicroSW.4
GND: B1.- Bluetooth1.4 C1.2 C2.2 C3.2 C4.2 C5.2 C6.2 C15.1 C16.1 C17.1 C18.1 C20.2 C21.2 C22.2 C23.2 C24.2 C25.2 C26.2 C27.2 C28.2 C29.2 C30.1 C31.1 C32.2 C33.2 D1.1 D2.1 D3.1 D8.1 D9.1 D12.1 D13.1 D16.1 D17.1 D20.1 D21.1 dip-s1.1 dip-s2.1 H1.6 J1.2 J1.3 J2.6 J2.sh1 J2.sh2 J2.sh3 J2.sh4 Joystick.1 L298-1.1 L298-1.8 L298-1.15 L298-2.1 L298-2.8 L298-2.15 LCD1.1 LCD1.5 MicroSW.5 Q1.2 R2.1 R4.1 R5.2 R9.1 R16.2 R18.1 R20.1 R23.1 Serial.3 Servo.3 sw1.1 U1.3 U2.3 U3.3 U3.5 U4.2 U5.11 U5.32 U5.62 U5.81 U5.99 | length 254.9
  Top Layer w0.3: v1(224.05,232.75) C31.1 ; v1(224.65,225.9) C30.1 ; U5.11 229.55,214.45 v1(230.35,213.65) ; U5.99 228.5,219.3 231.3,216.5 v1(233.5,216.5) 235.15,216.5 237.5,218.85 U5.81 ; U5.32 231,208.25 v1(232,209.25) ; v1(237.1,213.75) 237.1,213.6 237.15,213.6 237.8,212.95 U5.62 ; Q1.2 245.7,247.065 R23.1 ; R20.1 269.3,233.65 v1(270.35,233.65) ; R18.1 269.275,237.8 v1(270.3,237.8) ; R16.2 v1(270.25,242) ; J2.sh4 279.05,244.2 J2.sh3 286,242.45 286,230.45 J2.sh2 285,228.7 v1(284.95,228.75) ; J2.sh1 v1(279.9,228.7)
  Top Layer w0.5: J2.6 280.05,233.15 v1(280.1,233.2)
  Top Layer w0.6: LCD1.1 203.77,258.35 211.05,258.35 212.18,257.22 LCD1.5 ; R5.2 268.05,210.05 v1(268.1,210)
  Top Layer w1: C29.2@279.208,209.075 279.3,208.983 v1(279.3,205.85)
  Top Layer w1.2: C5.2@186.85,159.141 191.643,159.141 197.7,159.141 C6.2 v1(197.7,155.4) ; R4.1@200.914,142.364 208.137,142.364 U2.3@209.55,143.777 ; U2.3@209.55,152.177 U2.3@209.55,143.777 ; C4.2@221.488,139.977 213.35,139.977 U2.3@209.55,143.777 ; v1(222.538,158.623) D2.1@222.538,160.907 ; C2.2@242.124,159.164 247.1,159.164 253.2,159.164 253.2,157.578 252.8,157.178 v1(252.8,155.3) ; C28.2@251.649,194.724 247.55,190.625 247.55,182.681 251.649,178.582 263.33,178.582 U3.3@264.73,179.982 ; v1(260.346,139.054) U1.3@260.55,138.85 ; U3.5@261.33,188.382 261.33,183.382 U3.3@264.73,179.982 ; U1.3@264.349,152.2 264.349,143.8 268.172,139.977 C1.2@276.523,139.977 ; U3.3@264.73,188.382 U3.3@264.73,179.982 ; v1(266.082,138.868) U1.3@266.2,138.75 ; v1(277.683,158.567) D1.1@277.683,160.98 ; J1.3@283.609,173.49 279.338,177.762 279.208,177.891 279.208,178.582 285.523,178.582 D3.1
  Bottom Layer w1.2: v1(205.486,139.192) D21.1@205.486,139.5 ; v1(211.328,139.192) v1@211.328,139.4 ; D13.1@260,139.692 260.346,139.346 v1(260.346,139.054) ; v1(266.082,138.868) v1@266.082,139.3
  other v1: 194.691,138.049 195.897,138.049 197.104,138.049 198.31,138.049 199.517,138.049 200.724,138.049 249.95,138.3 251.107,138.3 252.263,138.3 253.42,138.3 254.576,138.3 255.733,138.3 199.517,139.277 200.724,139.277 201.93,139.277 254.526,139.528 255.733,139.528 256.939,139.528 199.517,140.504 200.724,140.504 201.93,140.504 254.526,140.755 255.733,140.755 256.939,140.755 199.517,141.732 200.724,141.732 201.93,141.732 254.526,141.983 255.733,141.983 256.939,141.983 244.9,159.1 248.85,159.1 189.484,159.131 191.643,159.131 193.802,159.131 247.1,159.2 264.15,175.35 265.5,175.35 266.9,175.35 268.2,175.35 269.5,175.35 259.85,175.4 261.25,175.4 262.7,175.4 266.8,176.7 268.2,176.7 269.5,176.7 259.85,176.75 261.3,176.75 262.7,176.75 264.15,176.75 265.45,176.75 199.55,236.2 286.05,236.6 285.2,244.15
key1: sw2.2 sw5.2 sw8.2 U5.14 | length 48.8
  Top Layer w0.3: sw8.2@213.741,172.026 213.741,178.528 213.741,182.071 213.741,188.574 213.741,192.117 213.741,198.619 213.741,199.391 217.3,202.95 217.3,209.05 221.2,212.95 U5.14
key2: sw3.2 sw6.2 sw9.2 U5.15 | length 47.4
  Top Layer w0.3: sw9.2@220.409,172.026 220.409,178.528 220.409,182.071 220.409,188.574 220.409,192.117 220.409,198.619 220.409,200.441 217.89,202.96 217.915,208.815 221.55,212.45 U5.15
key3: sw4.2 sw7.2 sw10.2 U5.19 | length 45.6
  Top Layer w0.3: U5.19 222.85,210.45 220.211,207.811 220.211,205.27 226.861,198.619 227.076,198.619 227.076,192.117 227.076,188.574 227.076,182.071 227.076,178.528 sw10.2@227.076,172.026
key4: sw2.1 sw3.1 sw4.1 U5.16 | length 59.6
  Top Layer w0.3: sw2.1@209.22,192.117 sw2.1@209.22,198.619 ; sw3.1@215.887,192.117 sw3.1@215.887,198.619 ; sw4.1@222.555,192.117 222.555,198.619 222.555,199.845 218.464,203.936 218.464,208.564 221.85,211.95 U5.16
  Bottom Layer w0.3: sw2.1@209.22,198.619 209.22,196.88 209.8,196.3 215.65,196.3 215.887,196.537 ; sw3.1@215.887,198.619 215.887,196.537 ; sw4.1@222.555,198.619 222.555,196.955 221.95,196.35 216.075,196.35 215.887,196.537
key5: sw5.1 sw6.1 sw7.1 U5.17 | length 71.3
  Top Layer w0.3: sw5.1@209.22,182.071 sw5.1@209.22,188.574 ; sw6.1@215.887,182.071 sw6.1@215.887,188.574 ; sw7.1@222.555,182.071 222.555,188.574 224.65,190.669 224.65,199.05 219.047,204.653 219.047,208.297 222.2,211.45 U5.17
  Bottom Layer w0.3: sw5.1@209.22,188.574 209.22,186.83 210.15,185.9 215.15,185.9 215.887,186.637 215.887,186.763 ; sw6.1@215.55,188.236 215.887,188.574 sw6.1@215.887,187.087 ; sw6.1@215.9,187.1 sw6.1@215.887,187.087 ; sw7.1@222.555,188.574 222.555,186.855 221.7,186 216.65,186 215.887,186.763 ; 215.887,186.763 sw6.1@215.887,187.087
key6: sw8.1 sw9.1 sw10.1 U5.18 | length 80.6
  Top Layer w0.3: sw8.1@209.22,172.026 sw8.1@209.22,178.528 ; sw9.1@215.887,172.026 sw9.1@215.887,178.528 ; sw10.1@222.555,172.026 222.555,178.528 225.65,181.623 225.65,198.95 219.629,204.971 219.629,208.079 222.5,210.95 U5.18
  Bottom Layer w0.3: sw8.1@209.22,178.528 209.22,176.58 209.8,176 215.25,176 215.75,176.5 ; sw9.1@215.887,178.528 215.75,178.391 215.75,176.5 ; sw10.1@222.555,178.528 222.555,176.655 221.8,175.9 216.35,175.9 215.75,176.5
lcd_backlight: R22.1 U5.83 | length 28.2
  Top Layer w0.3: U5.83 236.5,235.4 243.75,242.65 R22.1
led1: U5.60
led2: U5.59
led3: U5.58
led4: U5.57
miso: H1.2.5 J2.7 U5.22 | length 122.1
  Top Layer w0.3: v1(223.8,205.9) 223.8,208.3 224.45,208.95 U5.22 227.05,208.95 228.3,210.2 228.3,213.15 v1(228.6,212.85)
  Top Layer w0.6: v1(239.75,226.75) 243.7,230.7 273.45,230.7 274.8,232.05 J2.7
  Bottom Layer w0.3: H1.2.5 190.22,240.28 222.561,207.939 222.93,207.939 223.8,207.069 v1(223.8,205.9)
  Bottom Layer w0.6: v1@228.35,213.2 228.35,215.35 v1(239.75,226.75)
mosi: H1.1 R17.1 U5.21 | length 134.8
  Top Layer w0.3: v1(222.5,206.9) 222.5,208 223.95,209.45 U5.21
  Top Layer w0.6: H1.1 189.59,234.25 207.35,234.25 211.7,238.6 v1(224.45,238.6) ; v1(248.85,235.45) 256.2,235.45 258.625,237.875 R17.1
  Bottom Layer w0.3: H1.1 191.96,237.74 222.5,207.2 v1(222.5,206.9)
  Bottom Layer w0.6: v1(224.45,238.6) 246,238.6 248.85,235.75 248.55,235.45 v1(248.85,235.45)
mosi3.3: J2.3 R17.2 R18.2 | length 16
  Top Layer w0.5: R17.2 R18.2 266.4,236.9 267.05,236.25 274.45,236.25 274.65,236.45 J2.3
NetC27_1: C27.1 L3.2 L4.1 U3.4 | length 34.5
  Top Layer w1.2: C27.1@251.649,186.182 259.147,193.68 263.03,193.68 ; U3.4@263.03,188.382 U3.4 263.03,193.68 ; L3.2 L4.1 267.874,198.524 263.03,193.68
NetC30_2: C30.2 U5.98 | length 4.7
  Top Layer w0.3: C30.2 229,225.4 U5.98
NetC31_2: C31.2 L5.1 U5.100 | length 16
  Top Layer w0.3: U5.100 227.4,221.45 223.611,225.239 223.611,228.161 224.8,229.35 L5.1 228.65,232.5 C31.2
NetC32_1: C32.1 U5.33 Y1.1 | length 16.3
  Top Layer w0.3: U5.33 231.5,202.5 229.8,200.8 229.8,195.41 Y1.1
  Bottom Layer w0.3: Y1.1 234.56,193.61 C32.1
NetC33_1: C33.1 U5.34 Y1.2 | length 14.4
  Top Layer w0.3: Y1.2 231.6,198.9 232,199.3 232,199.55 232,199.9 230.781,199.9 230.781,200.6 232,200.6 233.019,200.6 233.019,201.3 232,201.3 232,201.45 U5.34
  Bottom Layer w0.3: Y1.2 234.59,198.69 C33.1
NetD1_2: D1.2 L1.1 U1.2 | length 20.6
  Top Layer w1.2: U1.2@266.049,152.2 U1.2 266.049,158.55 270.463,162.964 270.53,162.964 272.497,164.931 D1.2
NetD2_2: D2.2 L2.1 U2.2 | length 20.4
  Top Layer w1.2: U2.2@211.25,152.177 U2.2 211.25,158.841 217.317,164.908 D2.2@222.45,164.908
NetD3_2: D3.2 L3.1 U3.2 | length 41.5
  Top Layer w1.2: U3.2@266.43,188.382 U3.2 266.43,191.48 267.85,192.9 281.67,192.9 L3.1 287.294,184.353 D3.2
Netdip-s1_2: dip-s1.2 R1.1 U1.5 | length 29.7
  Top Layer w0.5: R1.1@245.553,142.4 242.124,145.829 242.124,151.55 242.774,152.2 U1.5@260.949,152.2
Netdip-s2_2: dip-s2.2 R3.1 U2.5 | length 30
  Top Layer w0.6: R3.1@190.119,142.364 186.944,145.539 186.944,151.527 187.594,152.177 U2.5@206.15,152.177
NetLCD1_3: LCD1.3 R23.3 | length 50.9
  Top Layer w0.4: LCD1.3 207.1,253.05 v1(207.9,252.25)
  Bottom Layer w0.4: v1(207.9,252.25) 208.25,252.6 250.325,252.6 R23.3
NetLCD1_15: LCD1.15 R21.2 | length 8.6
  Top Layer w0.4: LCD1.15 240.9,253.28 R21.2
NetLCD1_16: LCD1.16 Q1.1 | length 5.6
  Top Layer w0.4: LCD1.16 242.425,256.6 Q1.1
Netled1_K: led1.2 R5.1 | length 3.7
  Top Layer w0.5: led1.2 264.876,214.308 R5.1
NetQ1_3: Q1.3 R22.2 | length 2.7
  Top Layer w0.4: R22.2 243.8,249.45 Q1.3
NetR2_2: R2.2 RM1.2 RM1.3 U1.4 | length 19.8
  Top Layer w0.3: RM1.2@251.624,141.22 RM1.3 251.624,143.76 253.064,145.2 R2.2@256.094,145.2
  Top Layer w0.5: R2.2@256.094,145.2 256.094,147.694 258.15,149.75 262.3,149.75 262.649,150.099 U1.4@262.649,152.2
NetR4_2: R4.2 RM2.2 RM2.3 U2.4 | length 19.5
  Top Layer w0.6: RM2.2 RM2.3 197.871,145.164 200.914,145.164 R4.2 200.914,146.812 203.962,149.86 207.391,149.86 207.85,150.319 U2.4@207.85,152.177
RS: LCD1.4 U5.89 | length 45
  Top Layer w0.3: LCD1.4 233.5,232.74 U5.89
rst: C19.2 H1.4 R7.1 sw1.2 U5.30 | length 85.5
  Top Layer w0.3: H1.4@187.01,245.36 192.1,250.45 sw1.2@193.586,250.45 ; sw1.2@193.586,244.148 sw1.2@193.586,250.45 ; sw1.2@193.586,250.65 sw1.2@193.586,250.45 ; sw1.2@193.986,243.948 194.435,243.499 R7.1 ; v1(226.8,202.8) 229.35,202.8 230,203.45 U5.30
  Bottom Layer w0.3: H1.4 H1.4@187.01,245.36 ; sw1.2@193.586,244.148 193.986,243.748 193.986,237.914 222.971,208.929 223.34,208.929 225.495,206.774 225.495,206.755 225.775,206.475 225.775,203.825 v1(226.8,202.8)
RX: Serial.1 U5.12 | length 52.9
  Top Layer w0.3: v1(215.3,208.25) 215.3,209 220.25,213.95 U5.12
  Bottom Layer w0.3: Serial.1@182.05,223.05 183.95,221.15 201.85,221.15 214.75,208.25 v1(215.3,208.25)
RX_b: Bluetooth1.2.5 R8.2 R9.2 | length 21.3
  Top Layer w0.3: Bluetooth1.2.5 183.29,239 188.1,239 189.1,240 R9.2 R8.2
RXD: R10.2 U5.2 | length 29.5
  Top Layer w0.3: R10.2 206.2,236.8 206,236.6 v1(206,236.05) ; v1(221.9,219.65) 221.9,219.3 222.25,218.95 U5.2
  Bottom Layer w0.3: v1(206,236.05) 206,234.9 206.15,234.75 206.1,234.7 221.15,219.65 v1(221.9,219.65)
sck: H1.3 R19.1 U5.20 | length 146.2
  Top Layer w0.3: H1.3 H1.3@187.03,242.82 ; v1(221.25,205.7) 221.25,207.8 223.4,209.95 U5.20
  Top Layer w0.6: H1.3@187.03,242.82 187.9,241.95 221.55,241.95 v1(223.3,240.2) ; v1(250.8,233.75) R19.1
  Bottom Layer w0.3: H1.3 186.83,242.82 188.875,240.775 190.425,240.775 222.766,208.434 223.135,208.434 225,206.569 225,205.1 224.6,204.7 222.25,204.7 v1(221.25,205.7)
  Bottom Layer w0.6: v1(223.3,240.2) 223.6,239.9 246.2,239.9 250.05,236.05 250.05,234.5 v1(250.8,233.75)
sck3.3: J2.5 R19.2 R20.2 | length 15.8
  Top Layer w0.5: R19.2 R20.2 268.05,235.4 274.55,235.4 275.7,234.25 J2.5
Servo-pwm: Servo.1 U5.24 | length 62.2
  Top Layer w0.3: v1(224.55,203.35) 224.9,203.7 224.9,206.45 224.35,207 224.35,207.75 224.55,207.95 U5.24
  Bottom Layer w0.3: Servo.1@182.77,227.1 183.85,227.1 186.35,229.6 199.35,229.6 220.211,208.739 220.211,205.27 222.131,203.35 v1(224.55,203.35)
state: Bluetooth1.1 C19.1 | length 35
  Top Layer w0.3: v1(197.3,250.45) 197.05,250.2 197.05,248.449 C19.1
  Bottom Layer w0.3: Bluetooth1.1@182.05,237.9 Bluetooth1.1 182.95,237.7 184,238.75 184,251.2 185.45,252.65 195.25,252.65 197.3,250.6 v1(197.3,250.45)
step1-1: L298-1.5 U5.41 | length 111.5
  Top Layer w0.3: U5.41 235.5,197.8 237.487,195.813 237.487,169.5
  Top Layer w0.6: 237.487,169.5 237.487,133.062 241.15,129.4 269.393,129.4 L298-1.5
step1-2: L298-1.7 U5.42 | length 106.9
  Top Layer w0.3: U5.42 236,198.45 238.65,195.8 238.65,169.55
  Top Layer w0.6: 238.65,169.55 238.65,133.6 241.8,130.45 267.903,130.45 L298-1.7
step1-3: L298-1.10 U5.39 | length 109.2
  Top Layer w0.3: U5.39 234.5,196.3 235.162,195.638 235.162,169.5
  Top Layer w0.6: 235.162,169.5 235.162,132.238 242.35,125.05 264.25,125.05 266.508,127.308 L298-1.10
step1-4: L298-1.12 U5.40 | length 104.3
  Top Layer w0.3: U5.40 235,197.15 236.325,195.825 236.325,169.45
  Top Layer w0.6: 236.325,169.45 236.325,132.675 242.85,126.15 262.333,126.15 L298-1.12
step1-E: L298-1.6 L298-1.11 U5.38 | length 125
  Top Layer w0.3: 234,169.5 U5.38
  Top Layer w0.6: 234,169.5 234,131.85 241.8,124.05 267.853,124.05 L298-1.6
  Bottom Layer w0.8: L298-1.11 265.238,132.562 266.75,131.05 269.05,131.05 271.588,128.512 L298-1.6
step1-termin-1: D6.1 D8.2 L298-1.2 Step1.1 | length 34.7
  Top Layer w1.2: L298-1.2 280.335,127.785 286.701,134.151 Step1.1
  Bottom Layer w1.2: D8.2 D8.2@277.554,144.996 ; D6.1 D8.2@277.554,144.996 ; Step1.1 284.125,136.675 281.2,139.6 281.2,141.35 D8.2@277.554,144.996
step1-termin-2: D7.1 D9.2 L298-1.3 Step1.3 | length 40.7
  Top Layer w1.2: L298-1.3 275.398,132.002 277.4,130 280,130 283.95,133.95 283.95,140.05 285.655,141.755 Step1.3
  Bottom Layer w1.2: D7.1 D9.2 275.398,141.168 L298-1.3
step1-termin-3: D10.1 D12.2 L298-1.13 Step1.4 | length 50.4
  Top Layer w1.2: L298-1.13 262.698,133.648 263.85,134.8 279.25,134.8 282.45,138 282.45,141.5 285.245,144.295 Step1.4
  Bottom Layer w1.2: L298-1.13 262.698,141.364 D12.2 D10.1
step1-termin-4: D11.1 D13.2 L298-1.14 Step1.6 | length 62.2
  Top Layer w1.2: v2(258.6,136.5) 258.75,136.65 278.5,136.65 280.65,138.8 280.65,144.75 285.275,149.375 Step1.6
  Bottom Layer w1.2: v2@258.55,136.5 v2(258.6,136.5) ; D11.1 D13.2 258.313,142.715 258.428,142.6 258.428,138.911 258.2,138.683 258.2,131.013 L298-1.14
step2-1: L298-2.5 U5.7 | length 142.5
  Top Layer w0.3: 181.888,171.588 181.888,171.625 182.407,172.145 182.445,172.145 189.637,179.338 189.637,185.237 220.85,216.45 U5.7
  Top Layer w0.6: 181.888,171.588 181.888,135.312 187.7,129.5 214.844,129.5 L298-2.5
step2-2: L298-2.7 U5.8 | length 136.7
  Top Layer w0.3: 182.85,171.5 190.7,179.35 190.7,185.3 221.35,215.95 U5.8
  Top Layer w0.6: 182.85,171.5 182.85,136.05 188.55,130.35 213.154,130.35 L298-2.7
step2-3: L298-2.10 U5.5 | length 143.1
  Top Layer w0.3: 179.963,171.762 187.513,179.426 187.513,185.263 219.7,217.45 U5.5
  Top Layer w0.6: 179.963,171.762 179.963,133.888 189.009,124.841 208.915,124.841 L298-2.10
step2-4: L298-2.12 U5.6 | length 137.1
  Top Layer w0.3: 180.925,171.577 188.575,179.503 188.575,185.275 220.25,216.95 U5.6
  Top Layer w0.6: 180.925,171.577 180.925,134.625 189.693,125.857 207.391,125.857 L298-2.12
step2-E: L298-2.6 L298-2.11 U5.4 | length 160.2
  Top Layer w0.3: 179,171.9 186.45,179.35 186.45,185.25 219.15,217.95 U5.4
  Top Layer w0.6: 179,171.9 179,133.25 188.35,123.9 213.054,123.9 L298-2.6
  Bottom Layer w0.6: L298-2.11 210.566,132.461 212.319,130.708 213.97,130.708 L298-2.6
step2-termin-1: D14.1 D16.2 L298-2.2 Step2.1 | length 34.9
  Top Layer w1.2: L298-2.2 225.552,127.762 232.029,134.239 Step2.1
  Bottom Layer w1.2: D16.2 D16.2@223.012,144.788 ; D14.1 D16.2@223.012,144.788 ; Step2.1 228.6,136.652 225.425,139.827 225.425,142.375 D16.2@223.012,144.788
step2-termin-2: D15.1 D17.2 L298-2.3 Step2.3 | length 39.8
  Top Layer w1.2: L298-2.3 220.726,131.574 221.744,130.556 224.409,130.556 229.616,135.763 229.616,140.366 230.982,141.732 Step2.3
  Bottom Layer w1.2: D17.2 D17.2@217.17,144.98 ; D15.1 D17.2@217.17,144.98 ; L298-2.3 220.726,141.424 D17.2@217.17,144.98
step2-termin-3: D18.1 D20.2 L298-2.13 Step2.4 | length 51.3
  Top Layer w1.2: L298-2.13 208.026,134.176 208.978,135.128 225.298,135.128 227.838,137.668 227.838,141.688 230.422,144.272 Step2.4
  Bottom Layer w1.2: L298-2.13 208.026,141.676 D20.2@211.328,144.978 ; D20.2 D20.2@211.328,144.978 ; D18.1 D20.2@211.328,144.978
step2-termin-4: D19.1 D21.2 L298-2.14 Step2.6 | length 63.3
  Top Layer w1.2: v2(203.454,136.652) 224.79,136.652 226.187,138.049 226.187,144.887 230.652,149.352 Step2.6
  Bottom Layer w1.2: D21.2 D21.2@205.486,145.136 ; D19.1 D21.2@205.486,145.136 ; L298-2.14 203.454,131.064 v2(203.454,136.652) 203.454,143.104 D21.2@205.486,145.136
SW: Joystick.5 R24.2 U5.95 | length 72.7
  Top Layer w0.3: Joystick.5 187.37,212.67 189.9,215.2 194.05,215.2 214.8,235.95 229.55,235.95 232.05,233.45 232.05,224.7 230.5,223.15 U5.95
  Top Layer w0.8: R24.2 187.35,211.73 Joystick.5
TX: Serial.2 U5.13 | length 53.9
  Top Layer w0.3: v1(215.65,206.4) 216.6,207.35 216.6,209.3 220.75,213.45 U5.13
  Bottom Layer w0.3: Serial.2@182.05,220.51 201.54,220.51 v1(215.65,206.4)
TX_b: Bluetooth1.3 R10.1 | length 24.9
  Top Layer w0.3: Bluetooth1.3 183.23,241.6 187.3,241.6 187.7,241.2 204.6,241.2 R10.1
TXD: R8.1 U5.3 | length 32.2
  Top Layer w0.3: R8.1 202.393,236.157 202.65,235.9 v1(202.55,235.9) ; v1(219.95,219.35) 220.85,218.45 U5.3
  Bottom Layer w0.3: v1(202.55,235.9) 203.1,235.9 219.65,219.35 v1(219.95,219.35)
Vcc: Bluetooth1.5 C15.2 C17.2 C28.1 D4.2 Joystick.2 L4.2 L5.2 L298-1.9 L298-2.9 LCD1.2 led1.1 R1.2 R3.2 R7.2 R11.2 R12.2 R13.2 R14.2 R21.1 R23.2 R24.1 Servo.2 U4.1 U5.10 U5.31 U5.61 U5.80 | length 596.2
  Top Layer w0.3: U5.10 231.05,214.95 233.55,212.45 ; U5.31 230.5,209.4 233.55,212.45 ; U5.80 238,216.9 233.55,212.45 ; C28.1@251.649,202.324 251.649,204.501 243.7,212.45 U5.61 233.55,212.45
  Top Layer w0.4: L5.2 v1(229.7,229.35) ; v1(238.55,253.7) 238.55,248.9 R21.1 ; v1(243.05,227.35) 243.15,227.25 R11.2 R12.2 R13.2 R14.2 262.85,218.1 262.85,217.2
  Top Layer w0.5: R3.2@190.119,145.164 R3.2@190.364,145.164 ; v1(191.135,136.144) 191.643,136.652 191.643,144.399 190.878,145.164 R3.2@190.364,145.164 ; v1(196.05,148.55) 193.75,148.55 R3.2@190.364,145.164 ; v1(201.295,131.826) 201.93,131.191 211.455,131.191 L298-2.9 ; R1.2@245.553,145.2 246.95,143.803 246.95,136.2 v1(246.3,135.55) 242.1,135.55 239.6,138.05 239.6,190.275 C28.1@251.649,202.324 ; v1(256.05,131.95) 256.05,131.538 256.227,131.361 266.274,131.361 L298-1.9 ; 260.434,211.109 led1.1
  Top Layer w0.8: Servo.2@181.181,229.719 179.55,228.088 179.55,217.3 184.85,212 184.85,206.5 186.15,205.2 R24.1 191.4,205.2 194.99,208.79 Joystick.2
  Top Layer w1: Bluetooth1.5@181.05,247.86 180.39,247.86 179.85,248.4 179.85,250.827 181.023,252 186.9,252 188.6,253.7 193.708,253.7 195.358,252.05 202.45,252.05 ; R7.2 202.45,252.05 ; LCD1.2 204.56,254.16 202.45,252.05 ; v1(245.876,202.324) 251.649,202.324 255.13,202.324 255.524,202.324 260.434,207.234 260.434,211.109 260.434,214.784 262.85,217.2 269.898,217.2 D4.2 272.223,216.723 275.5,220 282.116,220 U4.1
  Top Layer w1.2: Bluetooth1.5@181.05,247.86 179.55,246.36 179.55,231.35 Servo.2@181.181,229.719 ; Servo.2@182.66,229.75 205.6,229.75 v4(206.15,230.3)
  Top Layer w1.5: 255.13,202.324 L4.2
  Bottom Layer w0.4: v1(229.7,229.35) 241.05,229.35 v1(243.05,227.35) ; v1@238.4,253.85 v1(238.55,253.7)
  Bottom Layer w0.5: v1(191.135,136.144) 193.675,136.144 196.342,133.477 199.644,133.477 v1(201.295,131.826) C17.2@201.295,131.953 ; v1(196.05,148.55) 196.8,148.55 203.8,155.55 203.8,158.4 204.6,159.2 206.05,159.2 208.4,156.85 238,156.85 240.05,154.8 v1(240,154.8) ; v1(246.3,135.55) 246.4,135.45 247.023,135.45 247.027,135.454 248.696,135.454 251.25,132.9 254.688,132.9 255.638,131.95 v1(256.05,131.95) 256.05,131.311 C15.2
  Bottom Layer w1: 204.411,255.091 204.56,255.24 ; LCD1.2 204.56,255.24 ; v4@206.4,230.35 232.65,204.1 244.1,204.1 v1(245.876,202.324) ; R23.2 249.045,253.85 238.4,253.85 205.95,253.85 204.56,255.24
VRX: Joystick.3 U5.97 | length 61.1
  Top Layer w0.3: Joystick.3 192.45,212.5 193.3,212.5 215.45,234.65 229.25,234.65 230.8,233.1 230.8,225.2 229.5,223.9 U5.97
VRY: Joystick.4 U5.96 | length 65.3
  Top Layer w0.3: Joystick.4 189.91,212.96 191.6,214.65 194.5,214.65 215.15,235.3 229.5,235.3 231.425,233.375 231.425,224.975 230,223.55 U5.96
Vstep1: C2.1 C3.1 C16.2 C20.1 C21.1 C22.1 D6.2 D7.2 D10.2 D11.2 L1.2 L298-1.4 RM1.1 | length 126.8
  Top Layer w1.2: C2.1@242.124,166.764 255.13,166.764 260.35,161.544 260.35,159.6 v1(257.75,157)
  Top Layer w1.5: v3(247.65,133.95) 248.3,134.6 248.3,135.729 248.295,135.734 248.295,139.487 248.3,139.492 248.3,143.087 251.513,146.3 RM1.1@251.624,146.3
  Bottom Layer w0.8: v3(247.65,133.95) 250.125,131.475 C22.1 C21.1 ; L298-1.4 277.356,131.013 C20.1@282.85,131.013
  Bottom Layer w1.2: v1(257.75,157) D11.2@260.096,154.654 ; D11.2 D10.2 D7.2 D6.2
  Bottom Layer w1.5: v3(247.65,133.95) 247.65,126.9 250.85,123.7 271.45,123.7 274.128,126.378 L298-1.4 ; RM1.1@251.624,146.3 259.978,154.654 260.096,154.654 D11.2
Vstep2: C5.1 C6.1 C18.2 C23.1 C24.1 C25.1 D14.2 D15.2 D18.2 D19.2 L2.2 L298-2.4 RM2.1 | length 133
  Top Layer w1.2: C5.1@187,166.741 199.95,166.741 203.75,162.941 204.954,164.146 206.4,162.7 206,162.3 204.575,160.875 205.2,160.25 v1(205.2,158.05)
  Top Layer w1.5: v3(192.659,134.366) 193.04,134.747 193.04,144.145 195.072,146.177 RM2.1@196.113,146.177
  Bottom Layer w0.8: v3(192.659,134.366) 192.659,133.911 C24.1 C25.1 ; L298-2.4 222.544,130.85 227.444,130.85 C18.2
  Bottom Layer w1.2: v1(205.2,158.05) 205.486,157.764 D19.2 D18.2 D15.2 D14.2
  Bottom Layer w1.5: v3(192.659,134.366) 192.532,134.239 192.532,126.365 195.347,123.55 216.133,123.55 219.456,126.873 L298-2.4 ; RM2.1 204.821,154.654 D19.2 ; C18.2 C23.1
pads on no net: H1.5 J1.MH J2.0 J2.1 J2.8 J2.9 LCD1.7 LCD1.8 LCD1.9 LCD1.10 LCD1.MH M1.S M2.S M3.S M4.S Step1.2.5 Step1.5 Step2.2.5 Step2.5 U5.1 U5.9 U5.25 U5.26 U5.27 U5.28 U5.29 U5.35 U5.36 U5.37 U5.43 U5.44 U5.45 U5.46 U5.47 U5.48 U5.49 U5.50 U5.51 U5.52 U5.53 U5.54 U5.55 U5.56 U5.63 U5.64 U5.65 U5.66 U5.67 U5.68 U5.69 U5.70 U5.71 U5.76 U5.77 U5.78 U5.79 U5.90 U5.91 U5.92 U5.93 U5.94

## Polygon pours and split planes (outlines as drawn)
GND on Bottom Layer "Bottom Layer-No Net" (solid, remove dead copper, pour order 0): 178.2,122.1 290.45,122.1 290.45,259.2 178,259.2

## Keep-outs
Keep-Out Layer:
  lines w0.4: 178,257.05 178,259.2 290.45,259.2 290.45,220.45 290.45,122.1 178,122.1 178,257.6

## Other copper
Top Layer:
  rectangle net 12V: 225.6,157.55 232.35,168.5
  rectangle net GND: 198.628,137.8 207.391,143.002
  rectangle net GND: 194.31,136.144 202.311,139.065
  rectangle net GND: 249.5,136.15 257.3,139.071
  rectangle net GND: 253.637,137.85 262.4,143.253
Bottom Layer:
  rectangle net 12V: 225.483,158 232.2,168.617

## Silkscreen, mask and mechanical layers (free items; w line width, h text height)
Top Overlay:
  circle w0.254: c192.45,196.35 r7
  circle w0.254: c192.45,196.35 r9.5
  lines w0.2: 223.78,123.212 259.35,123.212
  lines w0.4: 179.1,200.8 180.2,202.25 ; 179.31,178.85 179.31,213.35 ; 179.4,178.85 205.6,178.85 ; 179.4,213.35 198.47,213.35 205.45,213.35 ; 181.45,200.85 180.2,202.25 ; 195.8,186.35 197.45,185.05 ; 196.05,183.7 197.45,185.05 ; 205.59,178.85 205.59,213.35 ; 180.2,202.25 180.2,185.05 197.45,185.05
  text "RST" at 190,252.75 h1.2
  text "GND" at 186.8,252.15 h2 r90
  text "VCC" at 178.344,247.45 h1.2
  text "GND" at 178.301,244.887 h1.2
  text "TX" at 178.733,242.309 h1.2
  text "SCK" at 188.549,241.65 h1.2
  text "MISO" at 188.25,239.85 h1.2
  text "RX" at 178.696,239.746 h1.2
  text "MOSI" at 188.243,237.45 h1.2
  text "State" at 178.4,237.2 h1.2
  text "GND" at 184.433,231.7 h2
  text "VCC" at 184.506,229.15 h2
  text "PWM" at 184.2,226.45 h2
  text "RX" at 185.094,222.35 h2
  text "TX" at 185.156,219.75 h2
  text "MS1" at 251.408,218.15 h2
  text "GND" at 184.433,217.05 h2
  text "MS2" at 251.335,215.6 h2
  text "VCC" at 193.8,214 h1.2
  text "GND" at 196.55,214 h1.2
  text "MS3" at 251.373,213.05 h2
  text "MS4" at 251.329,210.5 h2
  text "GND" at 251.15,207.95 h2
  text "Y" at 181.1,198.6 h1.52
  text "X" at 194.35,182.1 h1.52

## Text inside footprints (layer, text, board x,y; h text height)
L298-1: Top Overlay "1" at 279.97,134.008 h1.5 r180
L298-2: Top Overlay "1" at 225.298,133.985 h1.5 r180
R23: Top Overlay "2" at 249.695,257.929 h1.27 r270; Top Overlay "3" at 252.235,248.15 h1.27 r270; Top Overlay "1" at 249.695,240.403 h1.27 r270
RM1: Top Overlay "CW" at 252.843,141.121 h1 r270
RM2: Top Overlay "CW" at 197.663,141.121 h1 r270
sw1: Top Overlay "4" at 194.119,250.955 h1.27 r90; Top Overlay "3" at 194.119,242.827 h1.27 r90; Top Overlay "2" at 189.801,250.955 h1.27 r90; Top Overlay "1" at 189.674,243.081 h1.27 r90
sw2: Top Overlay "4" at 214.274,198.924 h1.27 r90; Top Overlay "3" at 214.274,190.796 h1.27 r90; Top Overlay "2" at 209.956,198.924 h1.27 r90; Top Overlay "1" at 209.829,191.05 h1.27 r90
sw3: Top Overlay "4" at 220.942,198.924 h1.27 r90; Top Overlay "3" at 220.942,190.796 h1.27 r90; Top Overlay "2" at 216.624,198.924 h1.27 r90; Top Overlay "1" at 216.497,191.05 h1.27 r90
sw4: Top Overlay "4" at 227.609,198.924 h1.27 r90; Top Overlay "3" at 227.609,190.796 h1.27 r90; Top Overlay "2" at 223.291,198.924 h1.27 r90; Top Overlay "1" at 223.164,191.05 h1.27 r90
sw5: Top Overlay "4" at 214.274,188.879 h1.27 r90; Top Overlay "3" at 214.274,180.751 h1.27 r90; Top Overlay "2" at 209.956,188.879 h1.27 r90; Top Overlay "1" at 209.829,181.005 h1.27 r90
sw6: Top Overlay "4" at 220.942,188.879 h1.27 r90; Top Overlay "3" at 220.942,180.751 h1.27 r90; Top Overlay "2" at 216.624,188.879 h1.27 r90; Top Overlay "1" at 216.497,181.005 h1.27 r90
sw7: Top Overlay "4" at 227.609,188.879 h1.27 r90; Top Overlay "3" at 227.609,180.751 h1.27 r90; Top Overlay "2" at 223.291,188.879 h1.27 r90; Top Overlay "1" at 223.164,181.005 h1.27 r90
sw8: Top Overlay "4" at 214.274,178.833 h1.27 r90; Top Overlay "3" at 214.274,170.705 h1.27 r90; Top Overlay "2" at 209.956,178.833 h1.27 r90; Top Overlay "1" at 209.829,170.959 h1.27 r90
sw9: Top Overlay "4" at 220.942,178.833 h1.27 r90; Top Overlay "3" at 220.942,170.705 h1.27 r90; Top Overlay "2" at 216.624,178.833 h1.27 r90; Top Overlay "1" at 216.497,170.959 h1.27 r90
sw10: Top Overlay "4" at 227.609,178.833 h1.27 r90; Top Overlay "3" at 227.609,170.705 h1.27 r90; Top Overlay "2" at 223.291,178.833 h1.27 r90; Top Overlay "1" at 223.164,170.959 h1.27 r90
U5: Top Overlay "TQFP 100" at 231.19,210.97 h0.81; Top Overlay "R" at 237.39,212.38 h0.61